# Altium PCB PCB1.PcbDoc
Units mil, origin at the board's own origin, x right, y up, seen from the top; angles counter-clockwise.
Board outline 985.03 x 685.03 mil, 2 copper layers (Top Layer, Bottom Layer); 7 components, 6 nets, 15 pads, 0 vias.
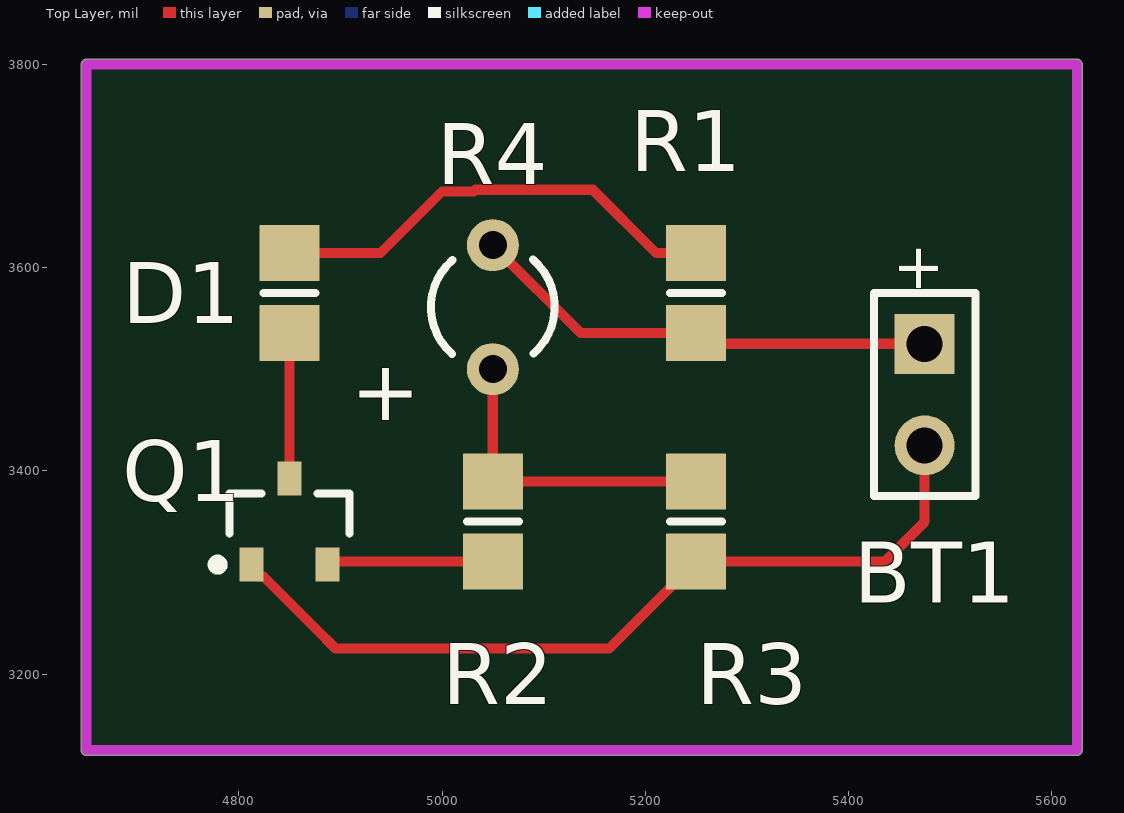
[diagram p0: Top Layer view]
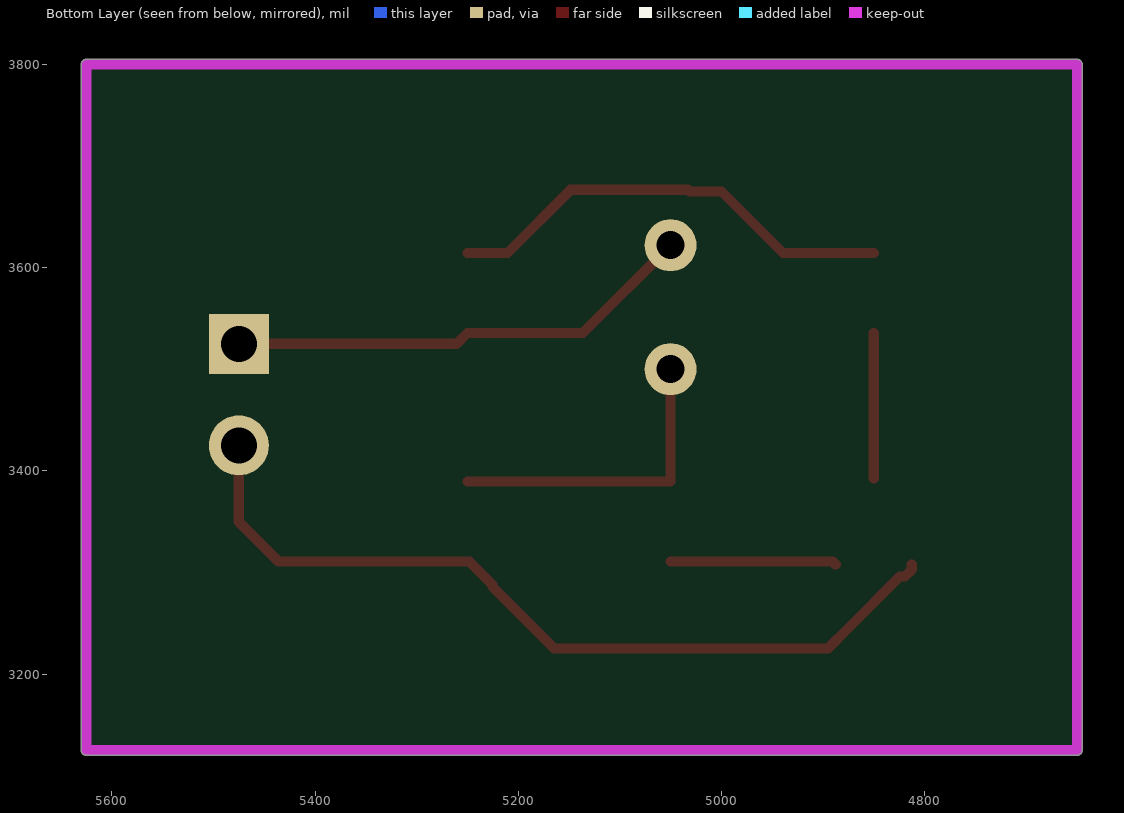
[diagram p1: Bottom Layer view, seen from below]

## Layer stack, top to bottom
Top Solder: solder mask 0.4, Solder Resist, Dk 3.5
Top Layer: signal copper 1.4
Dielectric 1: dielectric 12.6, FR-4, Dk 4.8
Bottom Layer: signal copper 1.4
Bottom Solder: solder mask 0.4, Solder Resist, Dk 3.5

## Board outline
4644.98,3125 ccw(c4650,3125) 4650,3119.99 5625,3119.99 ccw(c5625,3125) 5630.02,3125 5630.02,3800 ccw(c5625,3800) 5625,3805.01 4650,3805.01 ccw(c4650,3800) 4644.98,3800

## Design rules (kind name [scope] priority, off if disabled: settings)
Clearance [All] p1: gap=10 ignorepadtopadclearanceinfootprint=FALSE except(0: Arc-Hole Track-Hole SMDPad-Hole THPad-Hole Via-Hole Fill-Hole Poly-Hole Region-Hole Text-Hole)
PolygonConnect [All] p1: connectstyle=Relief reliefconductorwidth=10 reliefentries=4 polygonreliefangle="90 Angle" airgapwidth=10
RoutingVias [All] p1: holewidth=28 width=50 viastyle="Through Hole" minholewidth=28 minwidth=50 maxholewidth=28 maxwidth=50
SolderMaskExpansion [All] p1: expansion=4 istentingtop=FALSE
Width [All] p1: maxlimit=10 minlimit=10 preferedwidth=10
30 further rules are at their usual default settings.

## Components (designator, comment, footprint, x,y, rotation, side; value= is the part's Value field where it differs from the comment)
BT1 "4.5V" BAT-2 5475,3475 r270 top
D1 "LED0" 6-0805_M 4850,3575 r270 top
Q1 "8550" SOT-23B_L 4850,3350 r90 top
R1 "Res2" 6-0805_M 5250,3575 r270 top value=100
R2 "Res2" 6-0805_M 5050,3350 r270 top value=5.1K
R3 "Res2" 6-0805_M 5250,3350 r90 top value=10K
R4 "光敏电阻5547" R38 5050,3561.02 r180 top

## Footprints (in the part's own frame and the unit in brackets; to place one, negate y for a bottom-side part, rotate by r counter-clockwise, add the part's x,y. Pads: shape width x height; smd on the part's side, far side on the other; paste and mask are expansions set on the pad)
6-0805_M [mm] "Chip Resistor, Body 2.0x1.2mm, IPC Low Density"
  rect 1.4x1.5 smd: 1(-1,0) 2(1,0)
  silkscreen extent 0,-0.65 0,0.65, body extent -1.07,-0.7 1.07,0.7, height 0.7
BAT-2 [mm] "Battery; 2 Leads"
  rect 1.5x1.5 hole 0.9: 1(-1.27,0)
  round 1.5 hole 0.9: 2(1.27,0)
  silkscreen extent -2.54,-1.27 2.54,1.27
R38 [mm] "Crystal, Thru-Hole; 2 Leads; Body 3.1 x 8.2 mm (Dia.xH)"
  round 1.3 hole 0.7: 1(0,1.55) 2(0,-1.55)
  silkscreen extent -1.55,-1.19 1.55,1.17
SOT-23B_L [mm] "SOT23, 3-Leads, Body 2.9x1.3mm, Pitch 0.95mm, Lead Span 2.4mm, IPC High Density"
  rect 0.85x0.6 smd: 1(-1.075,0.95) 2(-1.075,-0.95) 3(1.075,0)
  silkscreen extent -1.2,-1.5 0.7,1.92, body extent -0.7,-1.5 0.7,1.5, height 1.14

## Part data
BT1: library part Battery, "Multicell Battery", LatestRevisionDate=17-Jul-2002, LatestRevisionNote="Re-released for DXP Platform.", PackageDescription="Battery; 2 Leads", PackageReference=BAT-2, Published=24-Mar-1999, Publisher="Altium Limited"
D1: "Typical INFRARED GaAs LED", LatestRevisionDate=08-Jul-2005, LatestRevisionNote="Mech Layer 1 removed.", PackageDescription="LED; 2 Leads", PackageReference=LED-0, Published=8-Jun-2000, Publisher="Altium Limited"
Q1: library part PNP, "PNP Bipolar Transistor", LatestRevisionDate=29-May-2009, LatestRevisionNote="IPC-7351 Footprint Added.", PackageDescription="3-Pin SOT-23 Package 0.95 mm Pitch, 2.4 mm Lead Span", PackageReference=SOT-23B, PackageVersion=Aug-1999, Published=8-Jun-2000, Publisher="Altium Limited"
R1 R2 R3: "Resistor", LatestRevisionDate=17-Jul-2002, LatestRevisionNote="Re-released for DXP Platform.", PackageDescription="Axial Device, Thru-Hole; 2 Leads; 0.4 in Pin Spacing", PackageReference=AXIAL-0.4, Published=8-Jun-2000, Publisher="Altium Limited"
R4: library part Res2, "Resistor", LatestRevisionDate=17-Jul-2002, LatestRevisionNote="Re-released for DXP Platform.", PackageDescription="Axial Device, Thru-Hole; 2 Leads; 0.4 in Pin Spacing", PackageReference=AXIAL-0.4, Published=8-Jun-2000, Publisher="Altium Limited"

## Nets (pads, with @x,y where several pads share a name; then routed paths per layer and width w, separated by ;. In a path a pad name is that pad's centre, name@x,y a point inside that pad or via, vN(x,y) a via of type N, cw(c..) or ccw(c..) an arc to the next point about the centre after c; other vN are vias at no path point)
NetBT1_1: BT1.1 R1.2 R4.2 | length 465.2
  Top Layer w10: R4.2 5136.42,3535.63 R1.2 5260.63,3525 BT1.1
NetBT1_2: BT1.2 Q1.1 R3.1 | length 827.5
  Top Layer w10: Q1.1 4812.6,3302.76 4819.41,3295.94 4824.33,3295.94 4875,3245.28 4895.28,3225 5164.37,3225 5225.47,3286.1 5225.47,3288.07 5248.03,3310.63 5435.63,3310.63 5475,3350 BT1.2
NetD1_1: D1.1 R1.1 | length 451.6
  Top Layer w10: D1.1 4939.37,3614.37 5000,3675 5031.57,3675 5033.19,3676.61 5148.39,3676.61 5210.63,3614.37 R1.1
NetD1_2: D1.2 Q1.3 | length 143.3
  Top Layer w10: Q1.3 D1.2
NetQ1_2: Q1.2 R2.2 | length 163.8
  Top Layer w10: Q1.2 4890.35,3310.63 R2.2
NetR2_1: R2.1 R3.2 R4.1 | length 310.6
  Top Layer w10: R4.1 R2.1 R3.2

## Keep-outs
Keep-Out Layer:
  lines w10: 4650,3125 5625,3125 5625,3800 4650,3800 4650,3125

## Silkscreen, mask and mechanical layers (free items; w line width, h text height)
Top Overlay:
  text "+" at 4910,3450 h60

## Text inside footprints (layer, text, board x,y; h text height)
BT1: Top Overlay "+" at 5450,3625 h45.28 r270